# EAGLE board NinjaPCB_ver2-180115 (EAGLE 6.6.0)
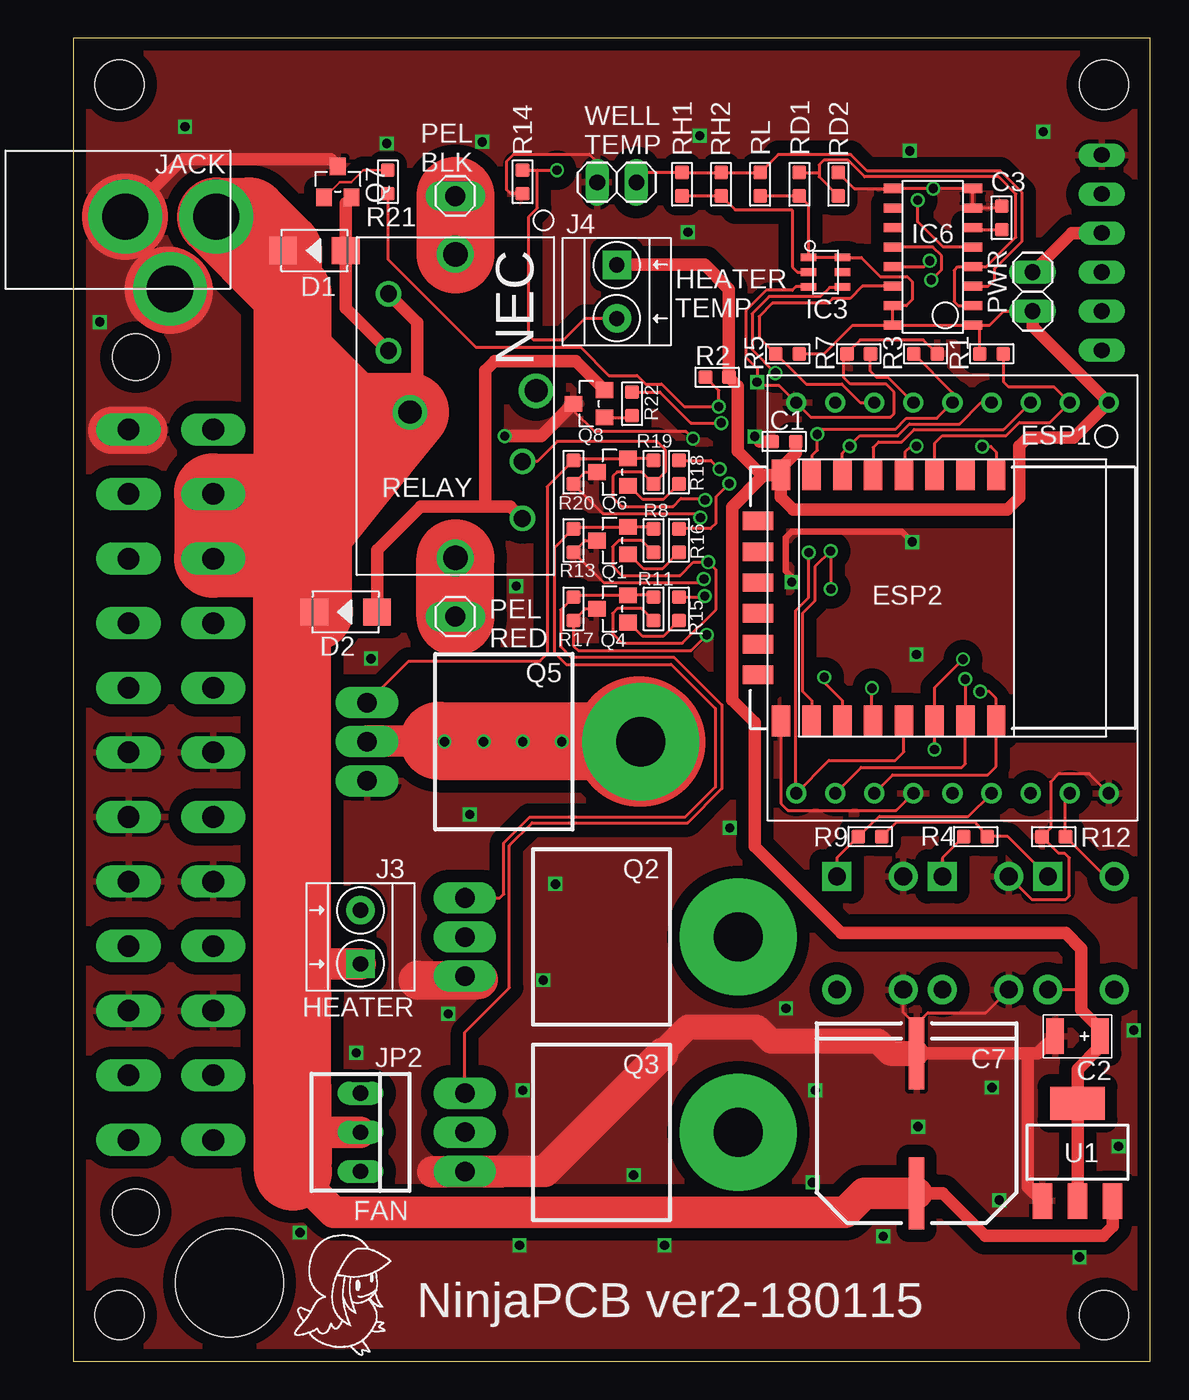
[diagram p0: board, top side]
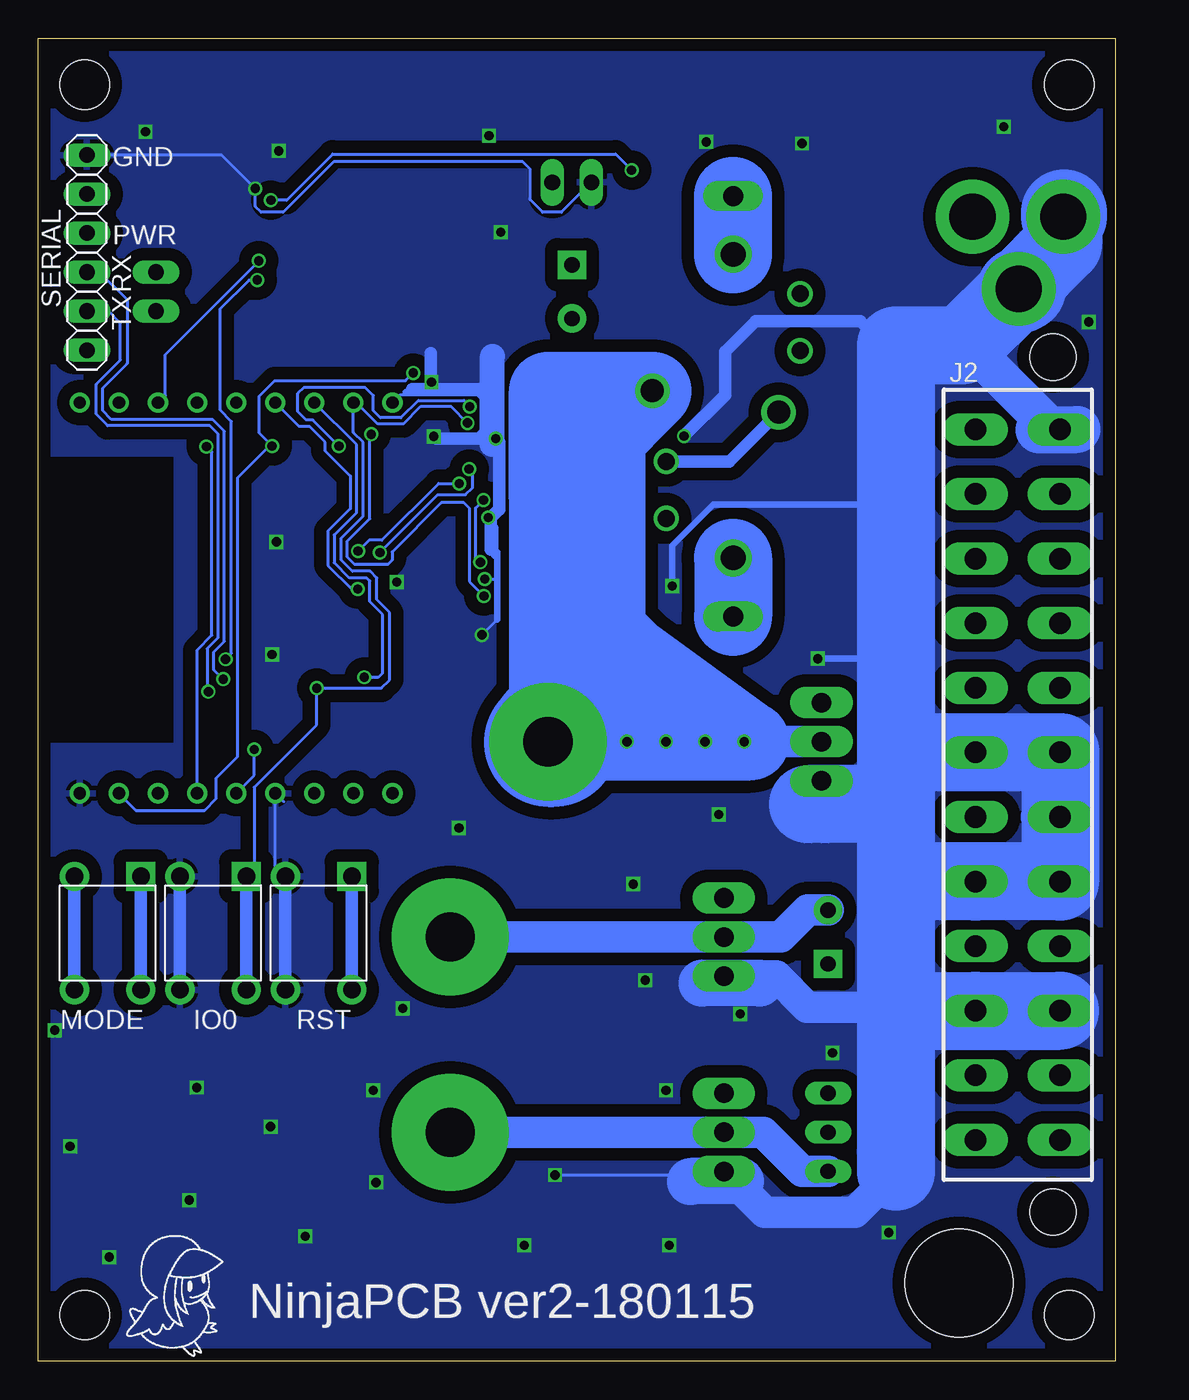
[diagram p1: board, bottom side, seen from below]

Size 70 x 86 mm. Coordinates in mm from the lower left corner, seen from the top.
Outline: 0,0 70,0 70,86 0,86 0,0
Copper layers (1*16): Top 0.035mm / dielectric 1.5mm / Bottom 0.035mm
Design rules "SeeedStudio_2layer_DRU_no_angle_20140221": minimum track width 6mil, minimum drill 12mil, track to track 6mil, track to pad 6mil, pad to pad 6mil, via to via 6mil, smd to smd 0mil, copper to edge 10mil, drill to drill 10mil, minimum pad ring 10mil, minimum via ring 6mil, stop-mask expansion 2mil, vias tented up to drill 100mil, thermal gap 10mil
Net classes: 1 2A: width 0.406 mm; 2 8A: width 2.54 mm
Holes 3.2 mm at 3,83 67,83 3,3 67,3
Holes 7 mm at 10.16,5.08

## Footprints (pad centres in the part's own frame; a part is rotated, then mirrored left to right if it is on the bottom)
C0603 = smd 0.889 x 0.889: 1 0,0.762; 2 0,-0.762
AVX-B = smd 1.143 x 2.286: + -1.46,0; - 1.46,0
CAP_SMD_AL_D125 = smd 1 x 4.7: P$M 0,-4.55; P$P 0,4.55
DO-214AC = smd 1.8 x 1.77: 1 -2.042,0; 2 2.042,0
ESP-12F = smd 2 x 1.2: 1 -8,3.48; 2 -8,1.48; 3 -8,-0.52; 4 -8,-2.52; 5 -8,-4.52; 6 -8,-6.52; 7 -8,-8.52; 8 -8,-10.52; 15 8,-10.52; 16 8,-8.52; 17 8,-6.52; 18 8,-4.52; 19 8,-2.52; 20 8,-0.52; 21 8,1.48; 22 8,3.48 | smd 1.2 x 2: 9 -5,-12; 10 -3,-12; 11 -1,-12; 12 1,-12; 13 3,-12; 14 5,-12
ESP-WROOM-02-BREAK = drill 0.8: P$1 -12.7,10.16; P$2 -12.7,7.62; P$3 -12.7,5.08; P$4 -12.7,2.54; P$5 -12.7,0; P$6 -12.7,-2.54; P$7 -12.7,-5.08; P$8 -12.7,-7.62; P$9 -12.7,-10.16; P$10 12.7,-10.16; P$11 12.7,-7.62; P$12 12.7,-5.08; P$13 12.7,-2.54; P$14 12.7,0; P$15 12.7,2.54; P$16 12.7,5.08; P$17 12.7,7.62; P$18 12.7,10.16
SOT-23-6 = smd 0.5 x 1: P$1 -0.95,-1.1; P$2 0,-1.1; P$3 0.95,-1.1; P$4 0.95,1.1; P$5 0,1.1; P$6 -0.95,1.1
SOP-16 = smd 0.6 x 1.2: P$1 -4.445,-2.6; P$2 -3.175,-2.6; P$3 -1.905,-2.6; P$4 -0.635,-2.6; P$5 0.635,-2.6; P$6 1.905,-2.6; P$7 3.175,-2.6; P$8 4.445,-2.6; P$9 4.445,2.6; P$10 3.175,2.6; P$11 1.905,2.6; P$12 0.635,2.6; P$13 -0.635,2.6; P$14 -1.905,2.6; P$15 -3.175,2.6; P$16 -4.445,2.6
SW4-6.0X6.0X5.0MM = drill 1.143 pad 1.905 square: 1 -3.683,2.159 | drill 1.143 pad 1.905: 2 -3.683,-2.159; 3 3.683,-2.159; 4 3.683,2.159
ATX24 = drill 1.4 long: 1 23.1,-2.75; 2 18.9,-2.75; 3 14.7,-2.75; 4 10.5,-2.75; 5 6.3,-2.75; 6 2.1,-2.75; 7 -2.1,-2.75; 8 -6.3,-2.75; 9 -10.5,-2.75; 10 -14.7,-2.75; 11 -18.9,-2.75; 12 -23.1,-2.75; 13 23.1,2.75; 14 18.9,2.75; 15 14.7,2.75; 16 10.5,2.75; 17 6.3,2.75; 18 2.1,2.75; 19 -2.1,2.75; 20 -6.3,2.75; 21 -10.5,2.75; 22 -14.7,2.75; 23 -18.9,2.75; 24 -23.1,2.75 | hole 3: 27.8,2.29; -27.8,2.29
H2-3.5-7.0X7.0MM = drill 1 pad 1.85 square: 1 -1.75,0 | drill 1 pad 1.85: 2 1.75,0
PJ-102A = drill 3 pad 4.8: RING 0.1,-3.39; RING_SW -4.6,-6.29; TIP 0.1,-9.29
22-23-2031 = drill 1 long: 1 -2.54,0; 2 0,0; 3 2.54,0
1X01LONG = drill 1.3 long: 1 0,0
1X02 = drill 1.016 long: 1 -1.27,0; 2 1.27,0
SOT-23 = smd 1.016 x 1.143: 1 -0.889,-1.016; 2 0.889,-1.016; 3 0,1.016
TO-220 = drill 1.27 pad 2.032 long: 1 -2.54,-11.43; 2 0,-11.43; 3 2.54,-11.43 | drill 3.2 pad 7.62: HEAT 0,6.35
R0603 = smd 0.889 x 0.889: 1 0,0.762; 2 0,-0.762
NEC-ET2-N8 = drill 1.6: P$1 -9.87,0; P$8 9.87,0 | drill 1.1: P$2 -7.3,-4.35; P$3 -3.6,-4.35; P$6 3.6,4.35; P$7 7.3,4.35 | drill 1.5: P$4 0.4,-2.95; P$5 -1,5.25
1X06 = drill 1.016 long: 1 -6.35,0; 2 -3.81,0; 3 -1.27,0; 4 1.27,0; 5 3.81,0; 6 6.35,0
SOT-223 = smd 1.27 x 2.286: 1 -2.286,-3.175; 2 0,-3.175; 3 2.286,-3.175 | smd 3.556 x 2.159: TER 0,3.175

## Placement (x,y rotation side)
C1  100nf  [C0603]  46.2,59.79 270 top
C2  22uf  [AVX-B]  65.28,21.12 180 top
C3  100nf  [C0603]  60.35,74.34 0 top
C7  CAP_SMDAL_1000UF_25V  [CAP_SMD_AL_D125]  54.81,15.46 180 top
D1  1N4007  [DO-214AC]  15.67,72.2 180 top
D2  1N4007  [DO-214AC]  17.7,48.71 180 top
ESP1  ESP-12F  [ESP-12F]  56.52,49.62 270 top
ESP2  ESP-WROOM-02-BREAK  [ESP-WROOM-02-BREAK]  57.15,49.62 270 top
IC3  ANALOGSW_AD_SOT23-6  [SOT-23-6]  48.9,70.8 270 top
IC6  NAU7802  [SOP-16]  55.88,71.8 90 top
IO0  [SW4-6.0X6.0X5.0MM]  58.65,27.83 270 bottom
J2  ATX24  [ATX24]  6.35,37.48 270 bottom
J3  HEATER  [H2-3.5-7.0X7.0MM]  18.67,27.57 90 top
J4  HEATER_TEMP  [H2-3.5-7.0X7.0MM]  35.33,69.53 270 top
JACK  2.1MMJACKTHM  [PJ-102A]  0,74.31 90 top
JP2  22-23-2031  [22-23-2031]  18.67,14.87 270 top
MODE  [SW4-6.0X6.0X5.0MM]  65.51,27.83 270 bottom
PEL_BLK  [1X01LONG]  24.84,75.76 0 top
PEL_RED  [1X01LONG]  24.84,48.4 0 top
PWR  [1X02]  62.36,69.53 270 top
Q1  S8550  [SOT-23]  35.05,53.35 90 top
Q2  IRF520NPBF  [TO-220]  36.88,27.57 270 top
Q3  IRF520NPBF  [TO-220]  36.88,14.87 270 top
Q4  S8550  [SOT-23]  35.05,48.91 90 top
Q5  IRF520NPBF  [TO-220]  30.53,40.27 270 top
Q6  S8550  [SOT-23]  35.05,57.8 90 top
Q7  S8550  [SOT-23]  17.2,76.67 0 top
Q8  S8550  [SOT-23]  33.53,62.24 90 top
R1  10K 1/10W  [R0603]  59.69,65.5 270 top
R2  10K 1/10W  [R0603]  41.86,63.97 270 top
R3  10K 1/10W  [R0603]  55.4,65.5 270 top
R4  10K 1/10W  [R0603]  58.65,34.1 270 top
R5  10K 1/10W  [R0603]  46.43,65.5 270 top
R7  10K 1/10W  [R0603]  51.05,65.5 90 top
R8  10K 1/10W  [R0603]  37.72,53.35 0 top
R9  10K 1/10W  [R0603]  51.79,34.1 270 top
R11  10K 1/10W  [R0603]  37.72,48.91 0 top
R12  10K 1/10W  [R0603]  63.73,34.1 90 top
R13  100K 1/10W  [R0603]  32.51,53.35 180 top
R14  2K  [R0603]  29.21,76.67 0 top
R15  10K 1/10W  [R0603]  39.37,48.91 0 top
R16  10K 1/10W  [R0603]  39.37,53.35 0 top
R17  100K 1/10W  [R0603]  32.51,48.91 180 top
R18  10K 1/10W  [R0603]  39.37,57.8 0 top
R19  10K 1/10W  [R0603]  37.72,57.8 0 top
R20  100K 1/10W  [R0603]  32.51,57.8 180 top
R21  10K 1/10W  [R0603]  20.45,76.67 180 top
R22  10K 1/10W  [R0603]  36.32,62.24 180 top
RD1  30K HP  [R0603]  47.19,76.52 0 top
RD2  30K HP  [R0603]  49.73,76.52 0 top
RELAY  NEC-RELAY2ET2  [NEC-ET2-N8]  24.84,62.09 270 top
RH1  30K HP  [R0603]  39.57,76.52 180 top
RH2  30K HP  [R0603]  42.11,76.52 180 top
RL  30K HP  [R0603]  44.65,76.52 0 top
RST  [SW4-6.0X6.0X5.0MM]  51.79,27.83 270 bottom
SERIAL  [1X06]  66.85,72.07 90 bottom
U1  CJT1117-3.3-SOT223  [SOT-223]  65.28,13.58 0 top
U$1  [TORI_0.25]  14.22,0.23 0 top
U$2  [TORI_0.25]  64.44,0.18 0 bottom
WELL_TEMP  [1X02]  35.33,76.65 180 top

## Library data of the parts
C1 C3 = Seeed-Capacitor; MPN: CC0603KRX7R9BB104
C2 = Seeed-Capacitor; MPN: TAJB226*016#NJ
C7 = Seeed-OPL-2017-01-Capacitor-akita
D1 D2 = Seeed-Diode; MPN: 1N4007
ESP1 = Seeed-OPL-2017-01-Sensor-camilo
ESP2 = PCR-Module
IC3 IC6 = PCR-IC
IO0 MODE RST = Seeed-Switch
J2 = PCR-Connector
J3 J4 = Seeed-Connector
JACK = adafruit
JP2 = con-molex; MF: MOLEX; MPN: 22-23-2031; OC_FARNELL: 1462950; OC_NEWARK: 30C0862
PEL_BLK PEL_RED PWR SERIAL WELL_TEMP = pinhead
Q1 Q4 Q6-Q8 = Seeed-Transistor; MPN: S8550
Q2 Q3 Q5 = Seeed-Transistor
R1-R5 R7-R9 R11 R12 R15 R16 R18 R19 R21 R22 = Seeed-Resistor; MPN: RC0603JR-0710KL
R13 R17 R20 = Seeed-Resistor; MPN: RC0603JR-07100KL
R14 = Seeed-Resistor; MPN: RC0603FR-072KL
RD1 RD2 RH1 RH2 RL = PCR-RCL
RELAY = PCR-Switch
U1 = Seeed-IC; MPN: CJT1117-3.3
U$1 U$2 = PCR-Logo

## Nets
3V3: C1.1 C2.+ ESP1.8 ESP2.P$1 IC3.P$1 IC3.P$6 IC6.P$1 IC6.P$15 IC6.P$16 J4.1 MODE.1 MODE.4 PWR.2 R1.2 R2.1 R4.1 R5.1 R9.1 RD1.2 RL.2 U1.2 U1.TER
12V: C7.P$P D1.2 D2.2 J2.10 J2.11 J3.1 JACK.TIP JP2.2 R8.2 R11.2 R19.2 RELAY.P$2 RELAY.P$4 RELAY.P$6 U1.3
DIVIDED: IC6.P$2 IC6.P$4 RD1.1 RD2.2
DRDY: ESP1.20 ESP2.P$14 IC6.P$12
EN: ESP1.3 ESP2.P$2 R1.1
FAN: ESP1.7 ESP2.P$5 R3.2 R15.1
GND: C1.2 C2.- C3.1 C7.P$M ESP1.15 ESP2.P$9 ESP2.P$13 ESP2.P$18 IC3.P$3 IC6.P$7 IC6.P$8 IC6.P$9 IO0.2 IO0.3 J2.3 J2.5 J2.7 J2.15 J2.17 J2.18 J2.19 J2.24 JACK.RING JACK.RING_SW Q1.3 Q2.3 Q3.3 Q4.3 Q5.3 Q6.3 Q7.3 Q8.3 R3.1 R7.1 R12.1 R13.1 R14.2 R17.1 R20.1 RD2.1 RST.2 RST.3 SERIAL.6 U1.1 WELL_TEMP.2
HEATER: ESP1.16 ESP2.P$6 R7.2 R16.1
HEATER_TEMP: IC6.P$5 J4.2 R14.1
HIGH_TEMP: ESP1.4 ESP2.P$17 IC3.P$4 MODE.2 MODE.3 R12.2
N$2: J3.2 Q2.2 Q2.HEAT
N$3: Q5.2 Q5.HEAT RELAY.P$5
N$4: JP2.3 Q3.2 Q3.HEAT
N$5: Q5.1 Q6.2 R19.1 R20.2
N$6: PEL_RED.1 RELAY.P$8
N$7: PEL_BLK.1 RELAY.P$1
N$25: Q3.1 Q4.2 R11.1 R17.2
N$27: IC3.P$2 RH1.1 RH2.1
N$29: Q1.2 Q2.1 R8.1 R13.2
N$30: Q6.1 R18.2
N$31: Q4.1 R15.2
N$32: Q1.1 R16.2
N$33: D1.1 Q7.2 RELAY.P$3
N$34: Q7.1 R21.2
N$35: Q8.1 R22.1
N$36: D2.1 Q8.2 RELAY.P$7
N$92: C3.2 IC6.P$6
PEL_PWM: ESP1.19 ESP2.P$10 R18.1
PEL_SWA: ESP1.6 ESP2.P$4 R2.2 R21.1
PEL_SWB: ESP1.18 ESP2.P$8 IO0.1 IO0.4 R4.2 R22.2
PWR: PWR.1 SERIAL.4
RESET: ESP1.1 ESP2.P$15 R9.2 RST.1 RST.4
RXD: ESP1.21 ESP2.P$11 SERIAL.3
SCLK: ESP1.5 ESP2.P$3 IC6.P$13
SDIO: ESP1.17 ESP2.P$7 IC6.P$14 R5.2
TXD: ESP1.22 ESP2.P$12 SERIAL.2
WELL_TEMP: IC6.P$3 RH1.2 RH2.2 RL.1 WELL_TEMP.1

## Tracks (layer width: path | path; a pad name or v marks a point on that pad's centre or on a via)
3V3
  Top 0.203: C2.+ 66.74,21.62 | 65.53,24.27 65.41,24.14 MODE.4 | R9.1 53.54,35.04 58.62,35.04 R4.1 60.76,34.1 MODE.1 | IC6.P$16 IC6.P$1 58.98,67.35 | IC6.P$16 IC6.P$15 54.15,68.62 54.53,69 54.53,70.19 54.2,70.53 52.45,70.53 51.22,71.75 IC3.P$6 IC3.P$1 47.8,75.16 RD1.2 RL.2 | 58.98,67.35 59.56,67.35 60.48,68.27 PWR.2 | R1.2 58.93,67.3 58.98,67.35 | R5.1 48.81,65.5 50.66,67.35 IC6.P$16
  Top 0.813: U1.2 U1.TER 65.28,18.96 66.74,20.42 C2.+ | 66.74,21.62 65.53,22.82 65.53,24.27 65.53,26.81 64.52,27.83 49.94,27.83 44.3,33.47 44.3,41.52 42.82,42.99 42.82,55.52 44.83,57.53 | ESP1.8 45.97,57.65 | ESP1.8 45.99,56.18 46.81,55.36 60.72,55.36 61.49,56.13 61.49,59.49 62.05,60.05 65.03,60.05 ESP2.P$1 62.36,67.27 PWR.2 | C1.1 46.97,59.03 45.99,58.06 ESP1.8 | J4.1 41.03,71.28 42.62,69.7 R2.1 43.2,63.39 43.2,59.16 44.83,57.53 | 44.83,57.53 44.92,57.62 ESP1.8
  Bottom 0.813: MODE.4 MODE.1
12V  (via drill 0.6)
  Top 0.203: D2.2 15.64,48.73 15.6,48.73 | J2.11 | 14.33,12.28 14.28,12.33 | 14.33,14.42 14.33,14.87 | RELAY.P$6 30.15,58.49 31.45,59.79 37.95,59.79 38.51,59.23 38.51,57.83 R19.2 36.95,57.81 35.36,57.81 35.08,57.53 35.08,56.16 35.66,55.58 38.99,55.58 39.5,56.08 40.97,56.08 v41.07,55.98 | R8.2 36.95,53.37 35.46,53.37 35.05,52.96 35.05,51.69 35.66,51.08 39.45,51.08 40.31,51.94 v41.27,51.94 41.78,51.44 41.78,48.87 39.6,46.69 35.66,46.69 35.05,47.3 35.05,48.62 35.36,48.92 36.95,48.92 R11.2
  Top 0.813: 20.61,59.06 19.77,59.06 | RELAY.P$2 22.35,67.53 22.35,63.21 21.89,62.75 RELAY.P$4 | 13.61,72.23 13.61,69.28 14.25,68.65 | U1.3 67.56,8.75 66.95,8.14 59.28,8.14 56.52,10.91 C7.P$P
  Top 2.032: RELAY.P$4 18.98,61.69 18.57,61.28 | JP2.2 14.33,14.87 14.25,14.87 | 14.65,23.28 14.25,23.69 | J3.1 14.6,25.82 14.25,26.18 | 14.33,12.28 16.94,9.67 50.16,9.67 51.41,10.91 C7.P$P
  Top 5.08: JACK.TIP 13.63,70.07 | 13.63,70.07 14.25,69.45 14.25,68.65 14.25,61.69 | 14.25,61.69 14.25,56.48 | 14.25,56.48 14.25,52.19 | 14.25,52.19 14.25,52.18 | 14.25,52.18 J2.10 | J2.11 9.1,56.48 14.25,56.48 | D1.2 13.63,70.07 | RELAY.P$4 14.25,61.69 | 21.89,61.71 19.77,59.06 14.25,52.19 | 14.33,65.52 18.57,61.28 | D2.2 14.25,50.12 | 14.25,50.12 14.25,52.18 | 9.32,74.41 11.43,74.41 13.61,72.23 | J2.11 J2.10 | 14.25,50.12 14.25,26.18 14.25,23.69 14.28,12.33 14.33,14.42 | 15.6,48.73 15.6,54.75
  Bottom 0.203: 27.18,58.59 27.28,58.49 | v41.27,51.94 41.55,52.22 41.58,52.22 41.58,55.47 v41.07,55.98
  Bottom 0.813: RELAY.P$6 27.28,58.49 25.09,58.49 RELAY.P$4
DIVIDED
  Top 0.203: IC6.P$2 57.53,68.62 57.25,68.9 57.25,70.91 57.51,71.16 IC6.P$4 59.36,71.16 61.27,73.06 61.27,75.89 60.15,77 51.44,77 50.37,78.07 48.77,78.07 48.49,77.79 48.49,77.31 | 48.49,77.31 48.49,77 RD2.2 | RD1.1 48.46,77.28 48.49,77.31
DRDY  (via drill 0.6)
  Top 0.203: v55.98,39.77 55.99,39.78 ESP1.20 55.99,43.79 v57.84,45.63 | v55.78,70.3 56.44,70.96 56.44,71.87 55.88,72.43 IC6.P$12
  Bottom 0.203: ESP2.P$14 55.98,38.09 v55.98,39.77 | v55.78,70.3 56.31,70.3 58.19,68.42 58.19,61.84 57.45,61.1 57.45,46.01 v57.84,45.63
EN
  Top 0.203: ESP1.3 55.99,59.68 56.49,60.17 60.63,60.17 61.49,61.04 63.48,61.04 ESP2.P$2 63.74,63.35 60.78,63.35 60.45,63.68 R1.1
FAN  (via drill 0.6)
  Top 0.203: ESP1.7 48.03,57.66 48.03,58.9 48.36,59.23 v48.36,60.26 48.67,60.57 53.42,60.57 54.15,61.3 56.13,61.3 ESP2.P$5 57.15,62.98 R3.2 | R15.1 40.97,49.67 v41.05,49.75
  Bottom 0.203: v41.05,49.75 41.99,50.69 41.99,55.46 42.34,55.82 43.81,55.82 47.02,52.62 47.02,52.09 47.3,51.81 49.45,51.81 49.94,52.29 49.94,53.3 48.46,54.78 48.46,60.16 v48.36,60.26
GND  (via drill 0.6)
  Top 0.203: R14.2 28.42,75.91 28.17,76.16 28.17,78.02 28.63,78.48 33.55,78.48 34.06,77.97 WELL_TEMP.2 | 54.79,21.83 53.95,22.67 RST.3 | 54.79,21.83 54.79,20.03 C7.P$M | 54.79,21.83 54.79,21.88 55.55,22.65 59.31,22.65 IO0.3 | ESP1.15 45.99,36.27 46.46,35.8 53.49,35.8 ESP2.P$13 | RD2.1 50.77,76.24 IC6.P$9 v55.91,76.24 IC6.P$8 IC6.P$7 60.22,74.97 C3.1 | 3.35,74.42 3.37,74.41 JACK.RING | 6.27,69.57 6.29,69.59 JACK.RING_SW | 38.31,20.01 38.49,20.19 | 54.48,20.07 54.56,19.99 55.09,19.99 | IO0.2 62.32,30 64.49,30 64.75,30.25 64.75,32.72 64.44,33.02 64.05,33.02 R12.1 63.52,34.66 63.52,37.67 64.03,38.18 66.06,38.18 ESP2.P$18 | R13.1 32.77,52.34 | R13.1 33.27,53.35 Q1.3 | Q4.3 33.27,48.91 R17.1 32.51,46.51 32.82,46.2 40.16,46.2 v41.17,47.22 | R13.1 34.48,50.62 40.77,50.62 v41,50.85 | Q6.3 33.27,57.8 R20.1 34.43,55.12 40.49,55.12 v40.77,54.84 | v40.28,59.98 39.84,60.43 33.88,60.43 32.51,61.8 Q8.3 | R3.1 55.26,66.4 51.16,66.4 50.29,65.53 R7.1 50.09,65.29 50.09,63.96 50.52,63.52 52.83,63.52 53.37,62.99 53.37,61.61 53.14,61.38 47.93,61.38 ESP2.P$9 45.89,63.42 44.68,63.42 v44.45,63.65 44.45,64.54 43.71,65.28 43.71,68.3 45.03,69.62 46.74,69.62 46.97,69.86 IC3.P$3
  Top 0.406: v54.53,53.26 53.85,53.95 46.71,53.95 46.3,53.54 46.3,51.38 46.71,50.98 v46.71,50.65
  Top 0.813: JACK.RING 7.12,78.14 16.74,78.14 Q7.3 | C2.- 62.7,20.01 62.05,20.01 | 62.05,20.01 C7.P$M | U1.1 62.05,11.34 62.05,20.01 | 38.31,20.07 38.31,20.01 | v28.04,60.15 30.41,60.15 Q8.3 | C1.2 44.63,59.79 v44.3,60.12
  Top 1.626: 38.31,20.07 39.96,21.72 44.42,21.72 45.34,20.8 52.3,20.8 53.09,20.01 C7.P$M
  Top 2.032: 38.31,20.01 30.63,12.33 Q3.3 | 23.37,12.32 27.81,12.32
  Top 2.54: 22.4,24.77 26.34,24.79
  Top 3.048: 2.49,60.53 4.6,60.53
  Top 5.588: 3.35,74.4 3.35,74.42 | 6.27,69.57 6.12,69.67
  Bottom 0.203: 54.05,36.36 ESP2.P$13 54.61,32.17 RST.2 | ESP2.P$9 46.48,62.83 45.85,62.83 | WELL_TEMP.2 36.02,74.69 37.24,74.69 38.05,75.5 38.05,77.51 38.53,77.99 50.8,77.99 54.1,74.69 55.52,74.69 55.91,75.07 v55.91,76.24 58.09,78.42 SERIAL.6 | 22.05,25.03 22.52,24.56 23.14,24.56 | 27.61,11.68 27.51,11.79 27.51,12.32 27.52,12.33 28.25,12.33 28.49,12.09 v36.42,12.09 | 45.85,62.83 40.58,62.83 40.06,62.31 40.06,60.21 v40.28,59.98 | v41.17,47.22 40.18,48.21 | v40.28,59.98 40.28,59.99 40.26,59.97 | 40.18,52.6 40.18,54.25 v40.77,54.84 | v41,50.85 40.18,50.85 | 43.92,59.97 43.92,59.99 43.94,60.17 | v40.28,59.98 v40.28,59.97 | 45.7,63.2 44.91,63.2 v44.45,63.65 | 45.82,62.99 45.82,62.85 45.85,62.83
  Bottom 0.406: v28.8,50.39 28.8,53.03 26.14,55.7 14.4,55.7 14.28,55.83 | v19.36,45.67 14.43,45.67 14.28,45.82 | 40.18,52.38 40.18,50.85 40.18,48.21 | 40.39,52.38 40.18,52.38 | 40.18,52.38 40.18,52.6 | 40.62,54.81 40.77,54.81 v40.77,54.84 | 45.82,62.99 46.13,62.99 | 40.82,62.31 41.71,63.2 | 41.58,59.84 41.58,60.05 40.77,60.86 40.77,60.21 40.06,60.21
  Bottom 0.813: 14.28,66.03 14.99,66.03 16.59,67.63 23.37,67.63 25.38,65.62 25.38,62.81 v28.04,60.15 | RST.3 RST.2 | IO0.2 IO0.3 | v40.28,59.98 40.06,59.76 40.06,55.42 40.64,54.84 v40.77,54.84 | v40.28,59.97 43.92,59.97 44.15,59.97 v44.3,60.12 | 40.59,54.84 40.59,52.81 40.62,52.78 40.62,54.81 40.06,55.37 | 44.5,63.27 44.5,65.53 | 41.12,63.2 41.71,63.2 45.7,63.2
  Bottom 1.626: 40.51,59.61 40.49,59.61 40.49,65.33
  Bottom 2.032: 14.28,37.96 14.28,37.73 Q5.3 18.87,37.51 18.87,36.21 | 14.28,25.03 14.28,24.8 | 14.28,12.33 16.94,9.67 22.78,9.67 Q3.3 | 15.44,20.44 15.42,20.41 14.86,20.41 13.74,21.53 13.92,21.53 14.28,21.17 | Q2.3 22.05,25.03 20.02,23 14.94,23 14.81,23.13 14.81,23.08 14.96,22.93 14.48,22.93 14.28,22.72
  Bottom 2.54: J2.24 4.08,60.58 9.53,66.03 12.29,66.03
  Bottom 3.048: 4.95,60.55 2.49,60.58 | 23.14,24.56 26.87,24.59 | 24.36,11.71 27.61,11.68
  Bottom 5.08: JACK.RING 3.39,72.61 JACK.RING_SW 9.97,66.03 12.29,66.03 14.28,66.03 14.28,55.83 14.28,45.82 14.28,39.58 | J2.15 J2.3 14.28,22.78 | 14.28,39.58 J2.7 J2.19 | 14.28,39.58 14.28,37.96 14.28,31.18 | 14.28,31.18 14.28,24.8 14.28,22.78 | 14.28,31.18 J2.5 J2.17 | J2.19 J2.18 | J2.19 3.58,39.58 3.58,31.43 | 14.28,22.78 14.28,22.72 14.28,21.17 14.28,12.33 | 15.7,36.34 15.7,36.21 18.87,36.21 19.96,36.21
  Bottom 5.588: 3.33,74.42 3.33,74.7 | 6.25,69.62 5.99,69.75
  other vias: 14.73,8.36 29.01,7.52 38.43,7.52 52.65,8.1 65.41,6.76 48.23,17.6 60.2,10.46 42.67,34.67 25.78,35.53 30.56,24.77 39.95,73.41 63.04,79.93 54.38,78.69 40.72,79.68 26.59,79.27 20.37,79.17 7.26,80.26 1.73,67.56 54.81,45.95 31.34,31.01 46.33,22.94 29.21,17.6 18.39,20.04 24.38,22.58 48.06,11.61 59.72,17.78 54.91,15.24 67.94,13.97 68.94,21.51
  pour Bottom (isolate 0.813): -2,88 72,88 72,59 61,59 61,40 72,40 72,-2 -2,-2
  pour Top (isolate 0.813): -4,90 74,90 74,59 61,59 61,40 74,40 74,-4 -4,-4
HEATER  (via drill 0.6)
  Top 0.203: ESP1.16 48.03,41.66 48.03,42.93 47.4,43.56 47.4,48.62 48.21,49.43 48.21,51.65 v49.23,52.67 49.25,52.64 v49.25,50.19 | R16.1 41.42,54.12 41.78,54.48 41.78,56.2 v42.65,57.06 | ESP2.P$6 52.97,63.96 52.22,63.96 51.82,64.36 R7.2
  Bottom 0.203: v49.23,52.67 48.51,53.38 47.68,53.38 43.99,57.06 v42.65,57.06 | ESP2.P$6 53.07,60.78 52.4,60.78 51.36,59.74 51.36,59.18 49.73,57.56 49.73,55.42 51.18,53.98 51.18,51.74 49.63,50.19 v49.25,50.19
HEATER_TEMP  (via drill 0.6)
  Top 0.203: IC6.P$5 56.54,72.43 54.89,74.08 v54.89,75.48 | J4.2 33.25,67.78 31.85,66.39 29.92,66.39 29.62,66.69 29.62,74.41 30.18,74.97 30.18,77.43 | R14.1 30.18,77.43 | 30.18,77.43 v31.45,77.43
  Bottom 0.203: v54.89,75.48 53.87,75.48 50.88,78.48 32.49,78.48 v31.45,77.43
HIGH_TEMP  (via drill 0.6)
  Top 0.203: ESP1.4 54.08,57.7 54.08,59.12 54.46,59.5 v54.81,59.5 | IC3.P$4 50.04,69.81 49.16,69.81 48.56,69.22 45.24,69.22 44.12,68.1 44.12,65.78 v45.64,64.25 | MODE.2 67.08,31.51 R12.2 64.49,36.64 ESP2.P$17
  Bottom 0.203: ESP2.P$17 63.66,35.81 59.21,35.81 58.45,36.58 58.45,37.91 57.05,39.31 57.05,57.44 54.99,59.5 v54.81,59.5 55.68,60.37 55.68,62.71 54.65,63.74 46.15,63.74 v45.64,64.25
  Bottom 0.813: MODE.3 MODE.2
N$2
  Bottom 2.032: Q2.HEAT Q2.2 21.74,27.57 19.99,29.32 J3.2
N$3  (via drill 0.6)
  Top 0.203: 36.91,40.22 36.88,40.25 Q5.HEAT | 23.77,40.33 23.82,40.27 v24.13,40.27 | Q5.2 19.58,40.27 19.58,40.31
  Top 2.032: 19.13,40.31 19.58,40.31 22.5,40.31 22.5,40.34
  Top 5.08: 23.77,40.33 36.91,40.33
  Top 8.382: 36.91,40.22 36.78,40.22 36.78,40.35
  Bottom 0.203: RELAY.P$5 30.07,63.08 | v29.21,40.27 29.23,40.29 32.26,40.29 | v31.75,40.27 31.6,40.43 31.6,42.33 | 36.85,40.22 36.88,40.25 Q5.HEAT | 23.72,40.3 24.11,40.3 v24.13,40.27
  Bottom 2.032: Q5.2 v24.13,40.27 v26.67,40.27 v29.21,40.27 v31.75,40.27 Q5.HEAT
  Bottom 5.08: RELAY.P$5 36.88,63.08 36.88,56.05 36.63,55.79 36.88,55.54 Q5.HEAT | 30.07,63.08 33.63,59.5 33.98,59.86 | 23.72,40.3 31.42,45.89 33.07,47.54 33.07,61.25 | 33.98,59.86 33.98,43.27 33.05,42.33 31.6,42.33 | 33.98,59.86 33.98,60.34 | 36.8,40.3 32.26,40.29 v24.13,40.27 23.75,40.3
  Bottom 8.382: 36.85,40.22 36.5,40.22 36.5,40.68
N$4
  Bottom 2.032: Q3.HEAT Q3.2 22.89,14.87 20.34,12.33 JP2.3
N$5
  Top 0.203: Q5.1 21.79,45.51 30.33,45.51 30.33,45.52 30.81,46 30.81,56.86 R20.2 32.64,58.69 Q6.2 36.58,58.69 37.59,58.69 R19.1
N$6
  Top 5.08: PEL_RED.1 RELAY.P$8
  Bottom 5.08: RELAY.P$8 PEL_RED.1
N$7
  Top 5.08: PEL_BLK.1 24.84,71.97
  Bottom 5.08: RELAY.P$1 PEL_BLK.1
N$25
  Top 0.203: Q3.1 25.45,21.38 28.35,24.27 28.35,33.52 29.82,34.99 39.93,34.99 42.16,37.23 42.16,42.66 39.06,45.76 32.37,45.76 31.67,46.46 31.67,48.83 R17.2 32.64,49.8 Q4.2 37.59,49.8 R11.1
N$27
  Top 0.203: RH1.1 RH2.1 43.02,74.85 46.71,74.85 46.74,74.83 46.74,71.14 47.07,70.81 IC3.P$2
N$29
  Top 0.203: Q2.1 27.74,30.11 27.99,30.37 27.99,33.7 29.67,35.37 39.78,35.37 41.73,37.33 41.73,42.43 38.86,45.3 32.04,45.3 31.27,46.08 31.27,52.87 R13.2 32.64,54.24 Q1.2 | Q1.2 36.2,54.12 | R8.1 37.59,54.24 Q1.2
N$30
  Top 0.203: R18.2 38.36,56.03 37.03,56.03 36.16,56.91 Q6.1
N$31
  Top 0.203: R15.2 38.34,47.12 37.03,47.12 36.13,48.02 Q4.1
N$32
  Top 0.203: R16.2 38.29,51.51 37.08,51.51 36.13,52.47 Q1.1
N$33
  Top 0.813: RELAY.P$3 17.71,68.47 D1.1 17.71,75.28 Q7.2
N$34
  Top 0.152: R21.2 18.86,77.43 18.09,76.66 17.31,76.66 Q7.1
N$35
  Top 0.203: Q8.1 36.2,61.36 R22.1
N$36
  Top 0.813: RELAY.P$7 28.42,55.56 26.92,55.56 | 26.92,55.56 22.58,55.56 19.75,52.73 D2.1 | 26.92,55.56 26.77,55.72 26.77,64.39 27.41,65.02 32.65,65.02 Q8.2
N$92
  Top 0.203: IC6.P$6 58.61,73.57 C3.2
PEL_PWM  (via drill 0.6)
  Top 0.203: ESP1.19 53.99,39.61 53.44,39.05 49.12,39.05 ESP2.P$10 46.97,36.95 46.97,48.79 47.8,49.63 v47.8,52.57 | R18.1 41.45,58.56 v42.01,58
  Bottom 0.203: v47.8,52.57 44.04,56.33 42.25,56.33 41.78,56.79 41.78,57.77 v42.01,58
PEL_SWA  (via drill 0.6)
  Top 0.203: R21.1 20.45,71.64 26.18,65.91 32.99,65.91 34.82,64.08 36.65,64.08 37.21,63.52 38.25,63.52 39.71,62.07 v41.96,62.07 41.96,63.11 R2.2 | ESP1.6 49.99,59.03 v50.47,59.5 51.13,60.16 53.59,60.16 54.36,60.92 57.61,60.92 59,62.32 ESP2.P$4
  Bottom 0.203: v50.47,59.5 52.16,61.19 52.6,61.19 53.14,61.72 53.14,62.93 52.76,63.31 48.77,63.31 48.23,62.78 48.23,61.79 47.78,61.33 46.44,61.33 45.31,62.46 42.35,62.46 v41.96,62.07
PEL_SWB  (via drill 0.6)
  Top 0.203: 51.92,41.7 ESP1.18 51.99,41.44 51.92,41.37 v51.92,43.75 | R4.2 56.49,32.7 IO0.1 | R22.2 38.14,63.01 40.14,61 v42.11,61
  Bottom 0.203: IO0.1 55.98,32.02 55.98,37.3 51.92,41.37 v51.92,43.75 47.71,43.75 47.17,44.3 47.17,48.67 48.01,49.51 48.01,50.93 48.44,51.36 49.59,51.36 50.34,52.11 50.34,53.48 48.9,54.93 48.9,59.74 49.53,60.38 ESP2.P$8 49.34,62.32 47.95,60.92 46.29,60.92 45.14,62.08 43.19,62.08 v42.11,61
  Bottom 0.813: IO0.4 IO0.1
PWR
  Top 0.813: PWR.1 64.9,73.34 SERIAL.4
RESET  (via drill 0.6)
  Top 0.203: ESP2.P$15 58.19,35.42 52.4,35.42 R9.2 49.63,32.7 RST.1 | 59.99,57.16 ESP1.1 59.99,59.11 59.64,59.46 v59.08,59.46
  Bottom 0.203: ESP2.P$15 59.69,46.23 58.73,47.19 58.73,59.11 v59.08,59.46
  Bottom 0.813: RST.4 RST.1
RXD  (via drill 0.6)
  Top 0.203: ESP2.P$11 51.21,38.6 57.76,38.6 57.99,38.83 ESP1.21 v57.99,44.34
  Bottom 0.203: v57.99,44.34 58.6,44.95 58.6,46.12 57.91,46.8 57.91,60.47 58.67,61.23 65.25,61.23 65.84,61.81 65.84,63.26 64.24,64.86 64.24,69 66.04,70.81 SERIAL.3
SCLK  (via drill 0.6)
  Top 0.203: IC6.P$13 55.3,71.16 v55.68,71.54 | ESP2.P$3 60.48,60.57 54.66,60.57 53.85,59.76 52.35,59.76 51.99,59.4 ESP1.5
  Bottom 0.203: v55.68,71.54 55.68,71.52 61.75,65.44 61.75,62.8 ESP2.P$3
SDIO  (via drill 0.6)
  Top 0.203: 50.49,42.12 ESP1.17 49.99,42.94 48.82,44.12 v48.82,44.47 | IC6.P$14 51.3,69.89 50.49,69.09 49.35,69.09 49.05,68.78 45.44,68.78 44.58,67.92 44.58,66.55 45.63,65.5 R5.2 47.64,63.52 49.96,63.52 51.17,62.32 ESP2.P$7
  Bottom 0.203: v48.82,44.47 47.89,44.47 47.62,44.73 47.62,48.54 48.46,49.38 48.46,50.72 48.67,50.93 49.79,50.93 50.77,51.91 50.77,53.71 49.33,55.16 49.33,59.58 ESP2.P$7
TXD  (via drill 0.6)
  Top 0.203: ESP1.22 59.99,38.67 59.44,38.12 53.26,38.12 ESP2.P$12 | ESP1.22 | ESP1.22 59.99,43.08 59.55,43.52 v58.95,43.52
  Bottom 0.203: SERIAL.2 65.43,68.27 64.67,67.5 64.67,65.09 66.24,63.52 66.24,61.56 65.51,60.82 58.85,60.82 58.32,60.29 58.32,47.03 59.03,46.32 59.03,43.6 v58.95,43.52
WELL_TEMP
  Top 0.203: IC6.P$3 59.46,69.89 59.89,70.32 59.89,71.03 61.67,72.81 61.67,75.99 60.27,77.38 51.61,77.38 50.55,78.45 45.82,78.45 RL.1 RH2.2 RH1.2 37.24,77.28 WELL_TEMP.1

## Text on the board
tPlace: JACK | WELL / TEMP | PEL / BLK | HEATER / TEMP | RELAY | PEL / RED | HEATER | FAN | NinjaPCB ver2-180115
bPlace: GND | PWR | RX | TX | NinjaPCB ver2-180115